# Allegro board PMOD2BNCSIMPLE_v1_06_62mil.brd
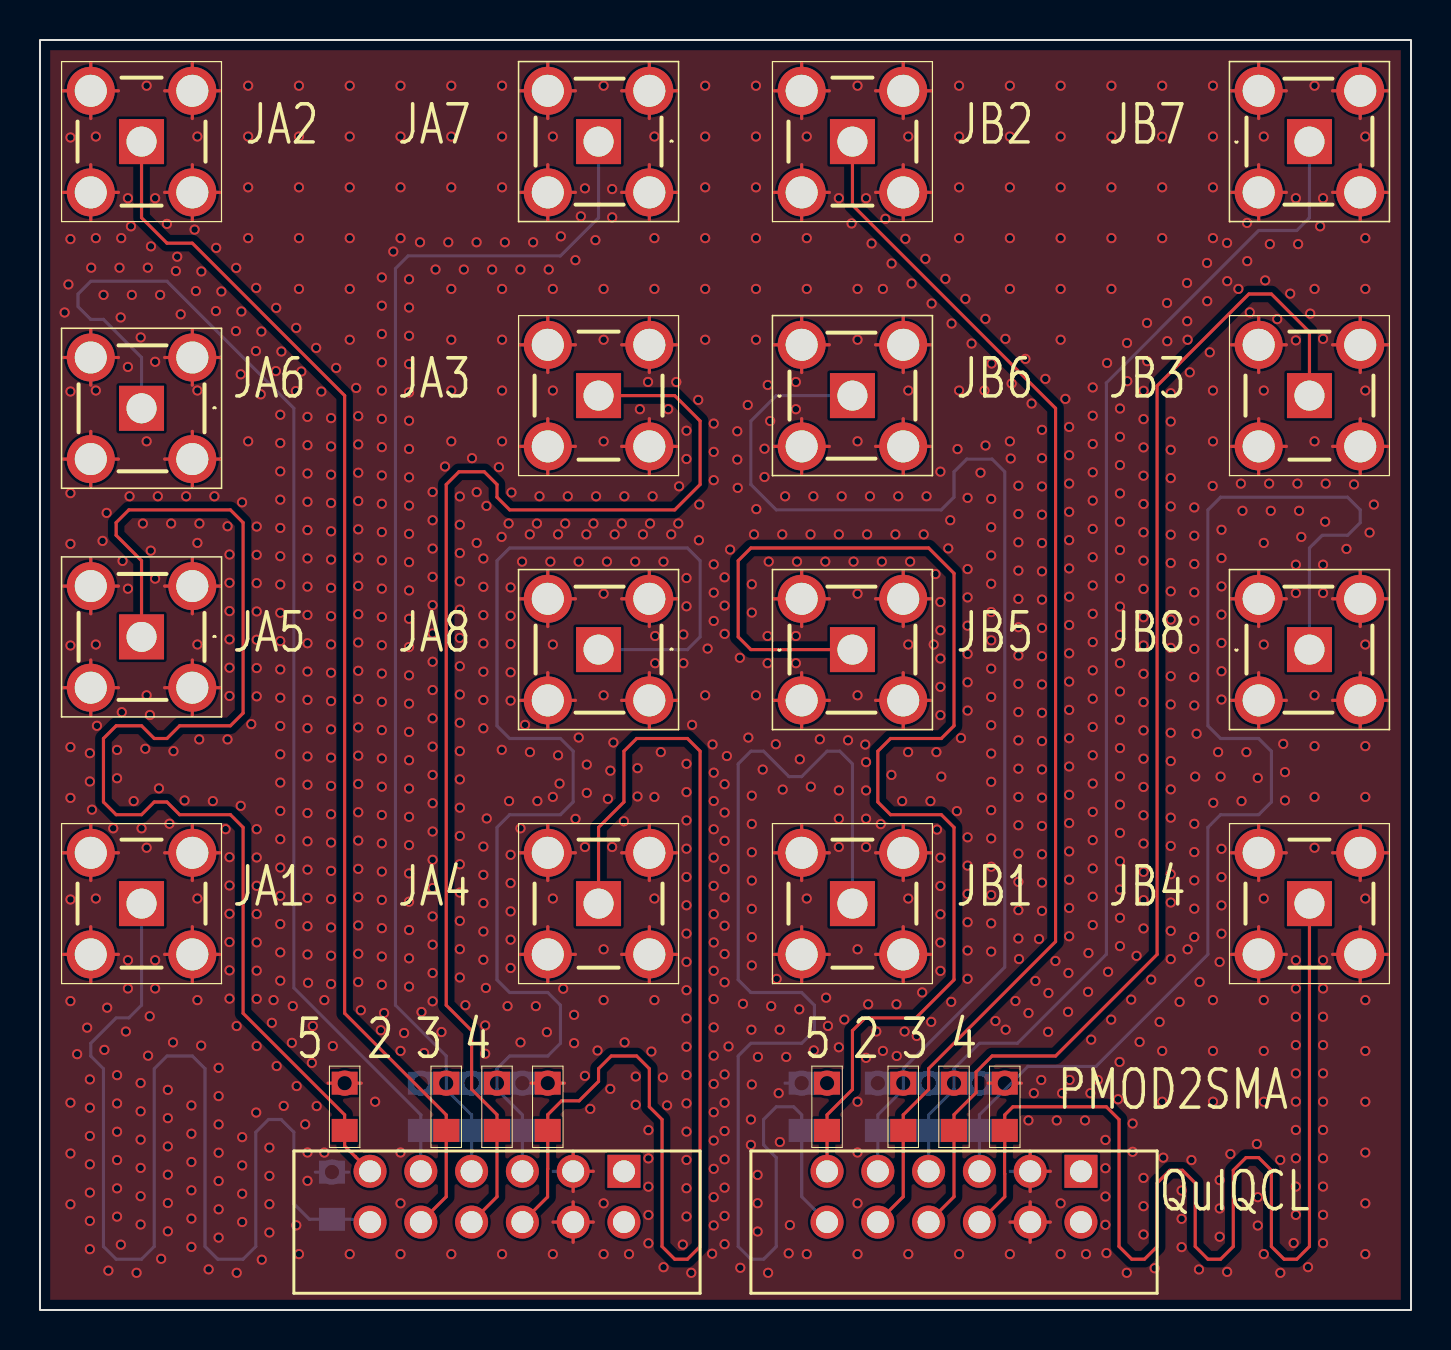
[diagram p0: board, top side]
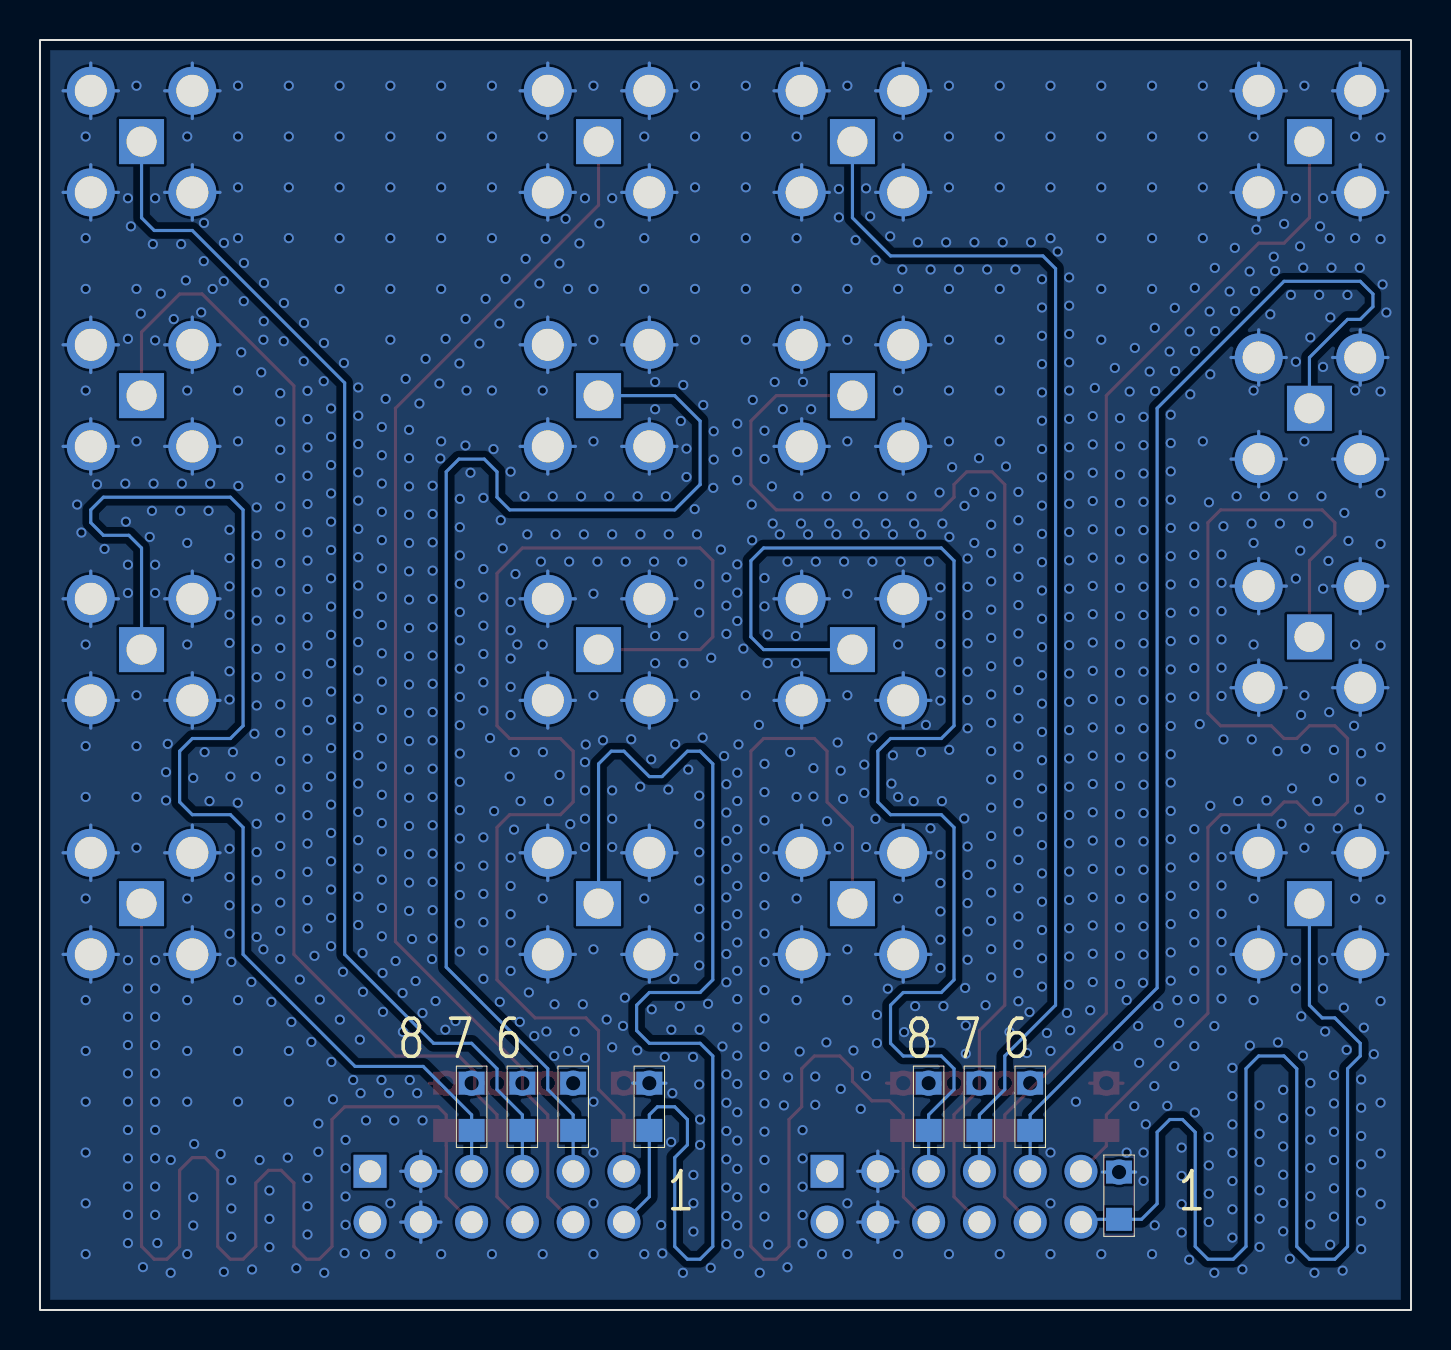
[diagram p1: board, bottom side, seen from below]

Outline 68.58 x 63.5 mm; copper layers: TOP, GND1, GND2, BOTTOM. Coordinates in mm from the lower left corner of the outline.
Outline path: rectangle 0,0 68.58,63.5

## Design rules (mm)
nets with their own width: min track width 0.157; nets GND N17882 N17894 N17906 N17918 N17930 N17948 N17973 N17998 N19655 N19661 N19667 N19673 N19679 N19687 N19697 N19707

## Placement (name value [footprint] x y rotation side)
J1  71764_0114  [717640112]  12.7 0.84 180 top
J2  71764_0114  [717640112]  35.56 0.84 180 top
R1  -  [RES_0805]  24.13 10.16 90 bottom
R2  -  [RES_0805]  21.59 10.16 90 bottom
R3  -  [RES_0805]  19.05 10.16 90 bottom
R4  -  [RES_0805]  15.24 10.16 90 top
R5  -  [RES_0805]  14.61 5.71 90 bottom
R6  -  [RES_0805]  20.32 10.16 90 top
R7  -  [RES_0805]  22.86 10.16 90 top
R8  -  [RES_0805]  25.4 10.16 90 top
R9  -  [RES_0805]  46.99 10.16 90 bottom
R10  -  [RES_0805]  44.45 10.16 90 bottom
R11  -  [RES_0805]  41.91 10.16 90 bottom
R12  -  [RES_0805]  39.37 10.16 90 top
R13  -  [RES_0805]  38.1 10.16 90 bottom
R14  -  [RES_0805]  43.18 10.16 90 top
R15  -  [RES_0805]  45.72 10.16 90 top
R16  -  [RES_0805]  48.26 10.16 90 top
U1  -  [SMA-R-RA]  5.08 33.66 180 top
U2  -  [SMAFST_PCBN]  5.08 20.32 180 top
U3  -  [SMA-R-RA]  5.08 45.09 180 top
U4  -  [SMAFST_PCBN]  5.08 58.42 180 top
U5  -  [SMA-R-RA]  27.94 58.42 180 top
U6  -  [SMAFST_PCBN]  27.94 45.72 180 top
U7  -  [SMA-R-RA]  27.94 33.02 180 top
U8  -  [SMAFST_PCBN]  27.94 20.32 180 top
U9  -  [SMA-R-RA]  40.64 33.02 0 top
U10  -  [SMAFST_PCBN]  40.64 20.32 180 top
U11  -  [SMA-R-RA]  40.64 45.72 0 top
U12  -  [SMAFST_PCBN]  40.64 58.42 180 top
U13  -  [SMA-R-RA]  63.5 58.42 0 top
U14  -  [SMAFST_PCBN]  63.5 45.72 180 top
U15  -  [SMA-R-RA]  63.5 33.02 0 top
U16  -  [SMAFST_PCBN]  63.5 20.32 180 top

## Library data of the parts
J1 J2 = 71764_0114
R1-R3 R5-R16 = RES_0805
R4 = RES_0805: signal model: resistorPack_850
U1 U3 U5 U7 U9 U11 U13 U15 = SMA-R-RA
U2 U4 U6 U8 U10 U12 U14 U16 = SMAFST_PCBN

## Footprints (pads in the part's own frame, mm; a bottom-side part is the same pattern mirrored in y, then rotated)
717640112
  rect 1.651x1.651 hole 1.1: 1(-16.51,-6.096)
  round 1.651 hole 1.1: 2(-16.51,-3.556) 3(-13.97,-6.096) 4(-13.97,-3.556) 5(-11.43,-6.096) 6(-11.43,-3.556) 7(-8.89,-6.096) 8(-8.89,-3.556) 9(-6.35,-6.096) 10(-6.35,-3.556) 11(-3.81,-6.096) 12(-3.81,-3.556)
RES_0805
  rect 1.151x1.3 smd: 1(1.181,0) 2(-1.181,0)
SMA-R-RA
  rect 2.25x2.25 hole 1.501: 1(0,0)
  round 2.4 hole 1.6: 2(-2.54,2.54) 3(-2.54,-2.54) 4(2.54,-2.54) 5(2.54,2.54)
SMAFST_PCBN
  rect 2.25x2.25 hole 1.501: 1(0,0)
  round 2.4 hole 1.6: 2(-2.54,-2.54) 3(2.54,-2.54) 4(2.54,2.54) 5(-2.54,2.54)

## Nets
GND: J1.3 J1.4 J2.3 J2.4 R1.1 R2.1 R3.1 R4.1 R5.1 R6.1 R7.1 R8.1 R9.1 R10.1 R11.1 R12.1 R13.1 R14.1 R15.1 R16.1 U1.2 U1.3 U1.4 U1.5 U2.2 U2.3 U2.4 U2.5 U3.2 U3.3 U3.4 U3.5 U4.2 U4.3 U4.4 U4.5 U5.2 U5.3 U5.4 U5.5 U6.2 U6.3 U6.4 U6.5 U7.2 U7.3 U7.4 U7.5 U8.2 U8.3 U8.4 U8.5 U9.2 U9.3 U9.4 U9.5 U10.2 U10.3 U10.4 U10.5 U11.2 U11.3 U11.4 U11.5 U12.2 U12.3 U12.4 U12.5 U13.2 U13.3 U13.4 U13.5 U14.2 U14.3 U14.4 U14.5 U15.2 U15.3 U15.4 U15.5 U16.2 U16.3 U16.4 U16.5
N17882: J1.11 R4.2 U1.1
N17894: J1.9 R3.2 U3.1
N17906: J1.7 R2.2 U5.1
N17918: J1.5 R1.2 U7.1
N17930: J1.12 R5.2 U2.1
N17948: J1.10 R6.2 U4.1
N17973: J1.8 R7.2 U6.1
N17998: J1.6 R8.2 U8.1
N19655: J2.11 R12.2 U9.1
N19661: J2.9 R11.2 U11.1
N19667: J2.7 R10.2 U13.1
N19673: J2.5 R9.2 U15.1
N19679: J2.12 R13.2 U10.1
N19687: J2.10 R14.2 U12.1
N19697: J2.8 R15.2 U14.1
N19707: J2.6 R16.2 U16.1

Pads without a net: J1 1 2; J2 1 2

## Via types
v1: diameter 0.508, hole 0.33, TOP to BOTTOM, 1266 vias
v2: diameter 1.27, hole 0.711, TOP to GND1, 8 vias
v3: diameter 1.27, hole 0.711, GND2 to BOTTOM, 8 vias

## Routing (per net, layer and track width the routed paths; a pad name or vN(x,y) marks a point on that pad's centre or on a via; arc(x,y) is an arc through that point)
GND: length 1488.4
  TOP w0.157: U12.3 38.1,62.34 ; U12.3 38.1,59.58 ; U12.3 39.48,60.96 ; U12.3 36.72,60.96 ; U8.5 31.86,17.78 ; U8.5 30.48,19.16 ; U8.5 30.48,16.4 ; U8.5 29.1,17.78 ; U2.5 9,17.78 ; U2.5 6.24,17.78 ; U2.5 7.62,16.4 ; U2.5 7.62,19.16 ; U15.3 60.96,31.86 ; U15.3 60.96,29.1 ; U15.3 59.58,30.48 ; U15.3 62.34,30.48 ; 30.48,46.88 U6.2 ; U6.2 30.48,49.64 ; U6.2 29.1,48.26 ; U6.2 31.86,48.26 ; 36.72,55.88 U12.4 ; U12.4 39.48,55.88 ; U12.4 38.1,57.26 ; U12.4 38.1,54.5 ; U16.5 66.04,19.16 ; U16.5 67.42,17.78 ; U16.5 64.66,17.78 ; U16.5 66.04,16.4 ; 25.4,16.4 U8.4 ; U8.4 26.78,17.78 ; U8.4 24.02,17.78 ; U8.4 25.4,19.16 ; U5.2 30.48,57.26 ; U5.2 31.86,55.88 ; U5.2 30.48,54.5 ; U5.2 29.1,55.88 ; U4.2 9,60.96 ; U4.2 7.62,62.34 ; U4.2 7.62,59.58 ; U4.2 6.24,60.96 ; 29.1,60.96 U5.3 ; U5.3 30.48,62.34 ; U5.3 31.86,60.96 ; U5.3 30.48,59.58 ; U9.4 44.56,30.48 ; U9.4 43.18,31.86 ; U9.4 43.18,29.1 ; U9.4 41.8,30.48 ; U14.4 62.34,43.18 ; U14.4 59.58,43.18 ; U14.4 60.96,41.8 ; U14.4 60.96,44.56 ; U14.5 66.04,44.56 ; U14.5 66.04,41.8 ; U14.5 64.66,43.18 ; U14.5 67.42,43.18 ; U13.3 62.34,55.88 ; U13.3 60.96,54.5 ; U13.3 60.96,57.26 ; U13.3 59.58,55.88 ; U7.3 31.86,35.56 ; U7.3 30.48,34.18 ; U7.3 30.48,36.94 ; U7.3 29.1,35.56 ; U12.5 43.18,57.26 ; U12.5 44.56,55.88 ; U12.5 43.18,54.5 ; U12.5 41.8,55.88 ; U4.4 2.54,57.26 ; U4.4 2.54,54.5 ; U4.4 3.92,55.88 ; U4.4 1.16,55.88 ; 1.16,60.96 U4.3 ; U4.3 2.54,62.34 ; U4.3 3.92,60.96 ; U4.3 2.54,59.58 ; U14.2 66.04,49.64 ; U14.2 64.66,48.26 ; U14.2 66.04,46.88 ; U14.2 67.42,48.26 ; U1.3 9,36.2 ; U1.3 7.62,34.81 ; U1.3 7.62,37.58 ; U1.3 6.24,36.2 ; 59.58,17.78 U16.4 ; U16.4 60.96,16.4 ; U16.4 60.96,19.16 ; U16.4 62.34,17.78 ; U15.5 67.42,35.56 ; U15.5 66.04,36.94 ; U15.5 66.04,34.18 ; U15.5 64.66,35.56 ; 30.48,21.48 U8.2 ; U8.2 31.86,22.86 ; U8.2 30.48,24.24 ; U8.2 29.1,22.86 ; 60.96,59.58 U13.2 ; U13.2 59.58,60.96 ; U13.2 60.96,62.34 ; U13.2 62.34,60.96 ; 24.02,60.96 U5.4 ; U5.4 26.78,60.96 ; U5.4 25.4,59.58 ; U5.4 25.4,62.34 ; 6.24,55.88 U4.5 ; U4.5 7.62,57.26 ; U4.5 9,55.88 ; U4.5 7.62,54.5 ; 2.54,34.81 U1.4 ; U1.4 2.54,37.58 ; U1.4 3.92,36.2 ; U1.4 1.16,36.2 ; U3.5 3.92,42.55 ; U3.5 1.16,42.55 ; U3.5 2.54,41.16 ; U3.5 2.54,43.93 ; 41.8,48.26 U11.5 ; U11.5 43.18,49.64 ; U11.5 43.18,46.88 ; U11.5 44.56,48.26 ; U11.3 39.48,43.18 ; U11.3 36.72,43.18 ; U11.3 38.1,41.8 ; U11.3 38.1,44.56 ; U15.2 62.34,35.56 ; U15.2 60.96,34.18 ; U15.2 59.58,35.56 ; U15.2 60.96,36.94 ; U5.5 25.4,57.26 ; U5.5 26.78,55.88 ; U5.5 25.4,54.5 ; U5.5 24.02,55.88 ; 43.18,41.8 U11.4 ; U11.4 44.56,43.18 ; U11.4 43.18,44.56 ; U11.4 41.8,43.18 ; 24.57,11.34 v2(25.4,11.34) 26.23,11.34 ; U1.5 3.92,31.11 ; U1.5 1.16,31.11 ; U1.5 2.54,32.5 ; U1.5 2.54,29.73 ; U9.3 39.48,30.48 ; U9.3 38.1,31.86 ; U9.3 36.72,30.48 ; U9.3 38.1,29.1 ; 25.4,21.48 U8.3 ; U8.3 24.02,22.86 ; U8.3 26.78,22.86 ; U8.3 25.4,24.24 ; 7.62,41.16 U3.2 ; U3.2 6.24,42.55 ; U3.2 7.62,43.93 ; U3.2 9,42.55 ; 38.1,16.4 U10.4 ; U10.4 36.72,17.78 ; U10.4 38.1,19.16 ; U10.4 39.48,17.78 ; U13.5 67.42,60.96 ; U13.5 64.66,60.96 ; U13.5 66.04,62.34 ; U13.5 66.04,59.58 ; 59.58,22.86 U16.3 ; U16.3 62.34,22.86 ; U16.3 60.96,24.24 ; U16.3 60.96,21.48 ; U6.4 26.78,43.18 ; U6.4 25.4,44.56 ; U6.4 25.4,41.8 ; U6.4 24.02,43.18 ; 66.04,21.48 U16.2 ; U16.2 64.66,22.86 ; U16.2 66.04,24.24 ; U16.2 67.42,22.86 ; J2.3 50.54,6.93 ; J2.3 49.53,5.93 ; J2.3 49.53,7.94 ; 49.09,11.34 v2(48.26,11.34) 47.43,11.34 ; 25.66,4.39 J1.4 ; J1.4 26.67,5.4 ; J1.4 26.67,3.39 ; J1.4 27.68,4.39 ; 29.1,43.18 U6.5 ; U6.5 30.48,41.8 ; U6.5 31.86,43.18 ; U6.5 30.48,44.56 ; U13.4 66.04,57.26 ; U13.4 64.66,55.88 ; U13.4 66.04,54.5 ; U13.4 67.42,55.88 ; 43.18,21.48 U10.2 ; U10.2 41.8,22.86 ; U10.2 43.18,24.24 ; U10.2 44.56,22.86 ; U7.5 26.78,30.48 ; U7.5 24.02,30.48 ; U7.5 25.4,29.1 ; U7.5 25.4,31.86 ; 16.07,11.34 v2(15.24,11.34) 14.41,11.34 ; 2.54,16.4 U2.4 ; U2.4 2.54,19.16 ; U2.4 3.92,17.78 ; U2.4 1.16,17.78 ; U7.4 26.78,35.56 ; U7.4 25.4,34.18 ; U7.4 24.02,35.56 ; U7.4 25.4,36.94 ; 49.53,3.39 J2.4 ; J2.4 48.52,4.39 ; J2.4 49.53,5.4 ; J2.4 50.54,4.39 ; 36.72,35.56 U9.2 ; U9.2 39.48,35.56 ; U9.2 38.1,34.18 ; U9.2 38.1,36.94 ; 2.54,46.24 U3.4 ; U3.4 1.16,47.62 ; U3.4 3.92,47.62 ; U3.4 2.54,49.01 ; 6.24,22.86 U2.2 ; U2.2 7.62,21.48 ; U2.2 9,22.86 ; U2.2 7.62,24.24 ; U6.3 25.4,49.64 ; U6.3 26.78,48.26 ; U6.3 25.4,46.88 ; U6.3 24.02,48.26 ; U3.3 9,47.62 ; U3.3 7.62,46.24 ; U3.3 7.62,49.01 ; U3.3 6.24,47.62 ; U10.3 39.48,22.86 ; U10.3 38.1,21.48 ; U10.3 38.1,24.24 ; U10.3 36.72,22.86 ; U14.3 60.96,49.64 ; U14.3 62.34,48.26 ; U14.3 60.96,46.88 ; U14.3 59.58,48.26 ; 41.8,35.56 U9.5 ; U9.5 44.56,35.56 ; U9.5 43.18,36.94 ; U9.5 43.18,34.18 ; 26.67,5.93 J1.3 ; J1.3 27.68,6.93 ; J1.3 26.67,7.94 ; 41.8,60.96 U12.2 ; U12.2 43.18,62.34 ; U12.2 44.56,60.96 ; U12.2 43.18,59.58 ; U11.2 39.48,48.26 ; U11.2 36.72,48.26 ; U11.2 38.1,49.64 ; U11.2 38.1,46.88 ; U15.4 66.04,31.86 ; U15.4 64.66,30.48 ; U15.4 67.42,30.48 ; U15.4 66.04,29.1 ; U7.2 31.86,30.48 ; U7.2 30.48,31.86 ; U7.2 29.1,30.48 ; U7.2 30.48,29.1 ; U2.3 2.54,24.24 ; U2.3 3.92,22.86 ; U2.3 2.54,21.48 ; U2.3 1.16,22.86 ; 41.8,17.78 U10.5 ; U10.5 44.56,17.78 ; U10.5 43.18,19.16 ; U10.5 43.18,16.4 ; 7.62,29.73 U1.2 ; U1.2 9,31.11 ; U1.2 7.62,32.5 ; U1.2 6.24,31.11
  GND1 w0.157: U1.2 7.62,32.5 ; U1.2 9,31.11 ; U1.2 6.24,31.11 ; U1.2 7.62,29.73 ; U11.2 38.1,49.64 ; U11.2 39.48,48.26 ; U11.2 38.1,46.88 ; U11.2 36.72,48.26 ; 7.62,59.58 U4.2 ; U4.2 7.62,62.34 ; U4.2 6.24,60.96 ; U4.2 9,60.96 ; 29.1,43.18 U6.5 ; U6.5 30.48,41.8 ; U6.5 30.48,44.56 ; U6.5 31.86,43.18 ; U5.4 25.4,62.34 ; U5.4 24.02,60.96 ; U5.4 26.78,60.96 ; U5.4 25.4,59.58 ; U10.3 39.48,22.86 ; U10.3 38.1,21.48 ; U10.3 38.1,24.24 ; U10.3 36.72,22.86 ; U8.3 26.78,22.86 ; U8.3 25.4,24.24 ; U8.3 25.4,21.48 ; U8.3 24.02,22.86 ; U4.3 3.92,60.96 ; U4.3 2.54,59.58 ; U4.3 2.54,62.34 ; U4.3 1.16,60.96 ; U13.3 60.96,57.26 ; U13.3 59.58,55.88 ; U13.3 62.34,55.88 ; U13.3 60.96,54.5 ; U1.4 2.54,37.58 ; U1.4 1.16,36.2 ; U1.4 2.54,34.81 ; U1.4 3.92,36.2 ; U6.3 26.78,48.26 ; U6.3 24.02,48.26 ; U6.3 25.4,46.88 ; U6.3 25.4,49.64 ; 1.16,42.55 U3.5 ; U3.5 2.54,43.93 ; U3.5 3.92,42.55 ; U3.5 2.54,41.16 ; U7.5 25.4,31.86 ; U7.5 25.4,29.1 ; U7.5 24.02,30.48 ; U7.5 26.78,30.48 ; 1.16,17.78 U2.4 ; U2.4 3.92,17.78 ; U2.4 2.54,16.4 ; U2.4 2.54,19.16 ; 59.58,22.86 U16.3 ; U16.3 62.34,22.86 ; U16.3 60.96,21.48 ; U16.3 60.96,24.24 ; U12.4 38.1,57.26 ; U12.4 39.48,55.88 ; U12.4 38.1,54.5 ; U12.4 36.72,55.88 ; U6.2 30.48,49.64 ; U6.2 30.48,46.88 ; U6.2 29.1,48.26 ; U6.2 31.86,48.26 ; U9.5 44.56,35.56 ; U9.5 43.18,34.18 ; U9.5 43.18,36.94 ; U9.5 41.8,35.56 ; 26.67,3.39 J1.4 ; J1.4 27.68,4.39 ; J1.4 25.66,4.39 ; J1.4 26.67,5.4 ; 66.04,59.58 U13.5 ; U13.5 66.04,62.34 ; U13.5 67.42,60.96 ; U13.5 64.66,60.96 ; 1.16,55.88 U4.4 ; U4.4 2.54,57.26 ; U4.4 2.54,54.5 ; U4.4 3.92,55.88 ; U15.4 67.42,30.48 ; U15.4 64.66,30.48 ; U15.4 66.04,29.1 ; U15.4 66.04,31.86 ; U12.2 44.56,60.96 ; U12.2 43.18,59.58 ; U12.2 41.8,60.96 ; U12.2 43.18,62.34 ; 64.66,43.18 U14.5 ; U14.5 67.42,43.18 ; U14.5 66.04,41.8 ; U14.5 66.04,44.56 ; U7.2 31.86,30.48 ; U7.2 29.1,30.48 ; U7.2 30.48,29.1 ; U7.2 30.48,31.86 ; 7.62,41.16 U3.2 ; U3.2 9,42.55 ; U3.2 7.62,43.93 ; U3.2 6.24,42.55 ; U11.5 43.18,49.64 ; U11.5 43.18,46.88 ; U11.5 41.8,48.26 ; U11.5 44.56,48.26 ; 64.66,48.26 U14.2 ; U14.2 66.04,46.88 ; U14.2 66.04,49.64 ; U14.2 67.42,48.26 ; 38.1,29.1 U9.3 ; U9.3 38.1,31.86 ; U9.3 36.72,30.48 ; U9.3 39.48,30.48 ; 60.96,59.58 U13.2 ; U13.2 60.96,62.34 ; U13.2 62.34,60.96 ; U13.2 59.58,60.96 ; 59.58,43.18 U14.4 ; U14.4 60.96,44.56 ; U14.4 62.34,43.18 ; U14.4 60.96,41.8 ; U8.5 31.86,17.78 ; U8.5 30.48,19.16 ; U8.5 29.1,17.78 ; U8.5 30.48,16.4 ; 66.04,16.4 U16.5 ; U16.5 66.04,19.16 ; U16.5 67.42,17.78 ; U16.5 64.66,17.78 ; 6.24,55.88 U4.5 ; U4.5 7.62,57.26 ; U4.5 7.62,54.5 ; U4.5 9,55.88 ; U14.3 60.96,49.64 ; U14.3 59.58,48.26 ; U14.3 60.96,46.88 ; U14.3 62.34,48.26 ; U9.2 39.48,35.56 ; U9.2 38.1,36.94 ; U9.2 36.72,35.56 ; U9.2 38.1,34.18 ; U5.5 26.78,55.88 ; U5.5 25.4,54.5 ; U5.5 24.02,55.88 ; U5.5 25.4,57.26 ; 30.48,54.5 U5.2 ; U5.2 31.86,55.88 ; U5.2 30.48,57.26 ; U5.2 29.1,55.88 ; 60.96,16.4 U16.4 ; U16.4 60.96,19.16 ; U16.4 62.34,17.78 ; U16.4 59.58,17.78 ; U11.4 44.56,43.18 ; U11.4 43.18,44.56 ; U11.4 41.8,43.18 ; U11.4 43.18,41.8 ; U10.2 43.18,24.24 ; U10.2 43.18,21.48 ; U10.2 44.56,22.86 ; U10.2 41.8,22.86 ; U10.4 39.48,17.78 ; U10.4 36.72,17.78 ; U10.4 38.1,16.4 ; U10.4 38.1,19.16 ; 24.02,17.78 U8.4 ; U8.4 25.4,19.16 ; U8.4 26.78,17.78 ; U8.4 25.4,16.4 ; 64.66,35.56 U15.5 ; U15.5 66.04,34.18 ; U15.5 66.04,36.94 ; U15.5 67.42,35.56 ; 7.62,16.4 U2.5 ; U2.5 6.24,17.78 ; U2.5 7.62,19.16 ; U2.5 9,17.78 ; U1.5 2.54,32.5 ; U1.5 3.92,31.11 ; U1.5 2.54,29.73 ; U1.5 1.16,31.11 ; 7.62,46.24 U3.3 ; U3.3 9,47.62 ; U3.3 6.24,47.62 ; U3.3 7.62,49.01 ; U15.2 62.34,35.56 ; U15.2 59.58,35.56 ; U15.2 60.96,36.94 ; U15.2 60.96,34.18 ; 2.54,21.48 U2.3 ; U2.3 2.54,24.24 ; U2.3 3.92,22.86 ; U2.3 1.16,22.86 ; U16.2 66.04,24.24 ; U16.2 66.04,21.48 ; U16.2 64.66,22.86 ; U16.2 67.42,22.86 ; U12.5 43.18,57.26 ; U12.5 44.56,55.88 ; U12.5 41.8,55.88 ; U12.5 43.18,54.5 ; U6.4 25.4,44.56 ; U6.4 26.78,43.18 ; U6.4 25.4,41.8 ; U6.4 24.02,43.18 ; U12.3 39.48,60.96 ; U12.3 38.1,59.58 ; U12.3 36.72,60.96 ; U12.3 38.1,62.34 ; 29.1,60.96 U5.3 ; U5.3 30.48,59.58 ; U5.3 30.48,62.34 ; U5.3 31.86,60.96 ; U9.4 44.56,30.48 ; U9.4 43.18,31.86 ; U9.4 43.18,29.1 ; U9.4 41.8,30.48 ; 24.02,35.56 U7.4 ; U7.4 25.4,36.94 ; U7.4 25.4,34.18 ; U7.4 26.78,35.56 ; 48.52,6.93 J2.3 ; J2.3 50.54,6.93 ; J2.3 49.53,5.93 ; J2.3 49.53,7.94 ; 7.62,21.48 U2.2 ; U2.2 9,22.86 ; U2.2 6.24,22.86 ; U2.2 7.62,24.24 ; U7.3 30.48,36.94 ; U7.3 29.1,35.56 ; U7.3 31.86,35.56 ; U7.3 30.48,34.18 ; U10.5 43.18,19.16 ; U10.5 44.56,17.78 ; U10.5 41.8,17.78 ; U10.5 43.18,16.4 ; U11.3 38.1,44.56 ; U11.3 39.48,43.18 ; U11.3 38.1,41.8 ; U11.3 36.72,43.18 ; 25.66,6.93 J1.3 ; J1.3 26.67,7.94 ; J1.3 26.67,5.93 ; J1.3 27.68,6.93 ; 1.16,47.62 U3.4 ; U3.4 2.54,46.24 ; U3.4 2.54,49.01 ; U3.4 3.92,47.62 ; U8.2 30.48,24.24 ; U8.2 29.1,22.86 ; U8.2 30.48,21.48 ; U8.2 31.86,22.86 ; 66.04,54.5 U13.4 ; U13.4 67.42,55.88 ; U13.4 64.66,55.88 ; U13.4 66.04,57.26 ; 59.58,30.48 U15.3 ; U15.3 60.96,29.1 ; U15.3 62.34,30.48 ; U15.3 60.96,31.86 ; 7.62,34.81 U1.3 ; U1.3 6.24,36.2 ; U1.3 9,36.2 ; U1.3 7.62,37.58 ; J2.4 49.53,5.4 ; J2.4 50.54,4.39 ; J2.4 48.52,4.39 ; J2.4 49.53,3.39
  GND2 w0.157: U9.5 44.56,35.56 ; U9.5 41.8,35.56 ; U9.5 43.18,34.18 ; U9.5 43.18,36.94 ; 66.04,59.58 U13.5 ; U13.5 67.42,60.96 ; U13.5 64.66,60.96 ; U13.5 66.04,62.34 ; U5.4 25.4,62.34 ; U5.4 25.4,59.58 ; U5.4 26.78,60.96 ; U5.4 24.02,60.96 ; 66.04,16.4 U16.5 ; U16.5 66.04,19.16 ; U16.5 64.66,17.78 ; U16.5 67.42,17.78 ; 6.24,55.88 U4.5 ; U4.5 7.62,54.5 ; U4.5 9,55.88 ; U4.5 7.62,57.26 ; 6.24,47.62 U3.3 ; U3.3 9,47.62 ; U3.3 7.62,46.24 ; U3.3 7.62,49.01 ; 41.8,22.86 U10.2 ; U10.2 43.18,21.48 ; U10.2 43.18,24.24 ; U10.2 44.56,22.86 ; J2.3 50.54,6.93 ; J2.3 49.53,5.93 ; J2.3 49.53,7.94 ; J2.3 48.52,6.93 ; U16.4 62.34,17.78 ; U16.4 60.96,19.16 ; U16.4 60.96,16.4 ; U16.4 59.58,17.78 ; U11.3 39.48,43.18 ; U11.3 38.1,41.8 ; U11.3 36.72,43.18 ; U11.3 38.1,44.56 ; U1.4 2.54,37.58 ; U1.4 3.92,36.2 ; U1.4 2.54,34.81 ; U1.4 1.16,36.2 ; U10.4 38.1,19.16 ; U10.4 36.72,17.78 ; U10.4 39.48,17.78 ; U10.4 38.1,16.4 ; 29.1,48.26 U6.2 ; U6.2 31.86,48.26 ; U6.2 30.48,46.88 ; U6.2 30.48,49.64 ; 25.4,29.1 U7.5 ; U7.5 24.02,30.48 ; U7.5 25.4,31.86 ; U7.5 26.78,30.48 ; 66.04,46.88 U14.2 ; U14.2 66.04,49.64 ; U14.2 67.42,48.26 ; U14.2 64.66,48.26 ; U16.3 62.34,22.86 ; U16.3 60.96,24.24 ; U16.3 60.96,21.48 ; U16.3 59.58,22.86 ; 38.1,46.88 U11.2 ; U11.2 36.72,48.26 ; U11.2 38.1,49.64 ; U11.2 39.48,48.26 ; U15.5 67.42,35.56 ; U15.5 64.66,35.56 ; U15.5 66.04,36.94 ; U15.5 66.04,34.18 ; 36.72,22.86 U10.3 ; U10.3 39.48,22.86 ; U10.3 38.1,21.48 ; U10.3 38.1,24.24 ; U6.4 25.4,44.56 ; U6.4 25.4,41.8 ; U6.4 26.78,43.18 ; U6.4 24.02,43.18 ; U2.4 3.92,17.78 ; U2.4 2.54,16.4 ; U2.4 2.54,19.16 ; U2.4 1.16,17.78 ; 7.62,21.48 U2.2 ; U2.2 7.62,24.24 ; U2.2 9,22.86 ; U2.2 6.24,22.86 ; U3.5 2.54,43.93 ; U3.5 1.16,42.55 ; U3.5 2.54,41.16 ; U3.5 3.92,42.55 ; 6.24,60.96 U4.2 ; U4.2 9,60.96 ; U4.2 7.62,62.34 ; U4.2 7.62,59.58 ; 59.58,60.96 U13.2 ; U13.2 60.96,59.58 ; U13.2 60.96,62.34 ; U13.2 62.34,60.96 ; 25.4,34.18 U7.4 ; U7.4 25.4,36.94 ; U7.4 26.78,35.56 ; U7.4 24.02,35.56 ; U8.4 26.78,17.78 ; U8.4 25.4,16.4 ; U8.4 25.4,19.16 ; U8.4 24.02,17.78 ; 25.4,21.48 U8.3 ; U8.3 25.4,24.24 ; U8.3 26.78,22.86 ; U8.3 24.02,22.86 ; U12.5 43.18,57.26 ; U12.5 41.8,55.88 ; U12.5 44.56,55.88 ; U12.5 43.18,54.5 ; U13.3 60.96,57.26 ; U13.3 60.96,54.5 ; U13.3 59.58,55.88 ; U13.3 62.34,55.88 ; 29.1,55.88 U5.2 ; U5.2 31.86,55.88 ; U5.2 30.48,57.26 ; U5.2 30.48,54.5 ; U1.2 7.62,32.5 ; U1.2 7.62,29.73 ; U1.2 9,31.11 ; U1.2 6.24,31.11 ; 24.02,55.88 U5.5 ; U5.5 26.78,55.88 ; U5.5 25.4,57.26 ; U5.5 25.4,54.5 ; U4.3 2.54,62.34 ; U4.3 1.16,60.96 ; U4.3 3.92,60.96 ; U4.3 2.54,59.58 ; 64.66,30.48 U15.4 ; U15.4 67.42,30.48 ; U15.4 66.04,29.1 ; U15.4 66.04,31.86 ; U9.2 39.48,35.56 ; U9.2 36.72,35.56 ; U9.2 38.1,36.94 ; U9.2 38.1,34.18 ; U5.3 31.86,60.96 ; U5.3 30.48,59.58 ; U5.3 29.1,60.96 ; U5.3 30.48,62.34 ; 29.1,30.48 U7.2 ; U7.2 31.86,30.48 ; U7.2 30.48,29.1 ; U7.2 30.48,31.86 ; 1.16,22.86 U2.3 ; U2.3 2.54,21.48 ; U2.3 3.92,22.86 ; U2.3 2.54,24.24 ; U1.3 9,36.2 ; U1.3 7.62,37.58 ; U1.3 6.24,36.2 ; U1.3 7.62,34.81 ; U9.4 43.18,31.86 ; U9.4 43.18,29.1 ; U9.4 44.56,30.48 ; U9.4 41.8,30.48 ; 25.66,6.93 J1.3 ; J1.3 27.68,6.93 ; J1.3 26.67,5.93 ; J1.3 26.67,7.94 ; U12.3 38.1,62.34 ; U12.3 38.1,59.58 ; U12.3 36.72,60.96 ; U12.3 39.48,60.96 ; U14.4 60.96,44.56 ; U14.4 59.58,43.18 ; U14.4 60.96,41.8 ; U14.4 62.34,43.18 ; U3.4 3.92,47.62 ; U3.4 2.54,49.01 ; U3.4 2.54,46.24 ; U3.4 1.16,47.62 ; U6.5 31.86,43.18 ; U6.5 30.48,41.8 ; U6.5 30.48,44.56 ; U6.5 29.1,43.18 ; 41.8,17.78 U10.5 ; U10.5 43.18,16.4 ; U10.5 44.56,17.78 ; U10.5 43.18,19.16 ; 6.24,42.55 U3.2 ; U3.2 7.62,43.93 ; U3.2 7.62,41.16 ; U3.2 9,42.55 ; 25.4,46.88 U6.3 ; U6.3 26.78,48.26 ; U6.3 25.4,49.64 ; U6.3 24.02,48.26 ; U12.2 44.56,60.96 ; U12.2 41.8,60.96 ; U12.2 43.18,59.58 ; U12.2 43.18,62.34 ; U7.3 30.48,36.94 ; U7.3 31.86,35.56 ; U7.3 29.1,35.56 ; U7.3 30.48,34.18 ; 43.18,46.88 U11.5 ; U11.5 41.8,48.26 ; U11.5 43.18,49.64 ; U11.5 44.56,48.26 ; U15.3 62.34,30.48 ; U15.3 60.96,31.86 ; U15.3 59.58,30.48 ; U15.3 60.96,29.1 ; U8.5 30.48,19.16 ; U8.5 29.1,17.78 ; U8.5 30.48,16.4 ; U8.5 31.86,17.78 ; 26.67,3.39 J1.4 ; J1.4 26.67,5.4 ; J1.4 27.68,4.39 ; J1.4 25.66,4.39 ; 64.66,22.86 U16.2 ; U16.2 67.42,22.86 ; U16.2 66.04,24.24 ; U16.2 66.04,21.48 ; U12.4 39.48,55.88 ; U12.4 38.1,54.5 ; U12.4 36.72,55.88 ; U12.4 38.1,57.26 ; U14.5 66.04,44.56 ; U14.5 64.66,43.18 ; U14.5 67.42,43.18 ; U14.5 66.04,41.8 ; U15.2 62.34,35.56 ; U15.2 60.96,36.94 ; U15.2 60.96,34.18 ; U15.2 59.58,35.56 ; U9.3 38.1,31.86 ; U9.3 39.48,30.48 ; U9.3 36.72,30.48 ; U9.3 38.1,29.1 ; 29.1,22.86 U8.2 ; U8.2 31.86,22.86 ; U8.2 30.48,21.48 ; U8.2 30.48,24.24 ; U1.5 2.54,32.5 ; U1.5 1.16,31.11 ; U1.5 2.54,29.73 ; U1.5 3.92,31.11 ; U11.4 44.56,43.18 ; U11.4 43.18,44.56 ; U11.4 41.8,43.18 ; U11.4 43.18,41.8 ; 64.66,55.88 U13.4 ; U13.4 66.04,54.5 ; U13.4 67.42,55.88 ; U13.4 66.04,57.26 ; U4.4 2.54,57.26 ; U4.4 3.92,55.88 ; U4.4 2.54,54.5 ; U4.4 1.16,55.88 ; 6.24,17.78 U2.5 ; U2.5 9,17.78 ; U2.5 7.62,16.4 ; U2.5 7.62,19.16 ; 49.53,3.39 J2.4 ; J2.4 48.52,4.39 ; J2.4 50.54,4.39 ; J2.4 49.53,5.4 ; U14.3 60.96,49.64 ; U14.3 62.34,48.26 ; U14.3 59.58,48.26 ; U14.3 60.96,46.88
  BOTTOM w0.157: U11.4 43.18,44.56 ; U11.4 43.18,41.8 ; U11.4 41.8,43.18 ; U11.4 44.56,43.18 ; U2.2 7.62,24.24 ; U2.2 7.62,21.48 ; U2.2 6.24,22.86 ; U2.2 9,22.86 ; 60.96,16.4 U16.4 ; U16.4 60.96,19.16 ; U16.4 62.34,17.78 ; U16.4 59.58,17.78 ; U12.5 43.18,57.26 ; U12.5 44.56,55.88 ; U12.5 41.8,55.88 ; U12.5 43.18,54.5 ; J1.3 27.68,6.93 ; J1.3 26.67,7.94 ; J1.3 25.66,6.93 ; J1.3 26.67,5.93 ; U14.4 60.96,44.56 ; U14.4 62.34,43.18 ; U14.4 59.58,43.18 ; U14.4 60.96,41.8 ; U2.4 2.54,19.16 ; U2.4 3.92,17.78 ; U2.4 2.54,16.4 ; U2.4 1.16,17.78 ; U5.3 30.48,62.34 ; U5.3 29.1,60.96 ; U5.3 31.86,60.96 ; U5.3 30.48,59.58 ; 25.4,34.18 U7.4 ; U7.4 25.4,36.94 ; U7.4 26.78,35.56 ; U7.4 24.02,35.56 ; U6.2 31.86,48.26 ; U6.2 29.1,48.26 ; U6.2 30.48,49.64 ; U6.2 30.48,46.88 ; 38.1,46.88 U11.2 ; U11.2 36.72,48.26 ; U11.2 39.48,48.26 ; U11.2 38.1,49.64 ; 64.66,55.88 U13.4 ; U13.4 66.04,57.26 ; U13.4 67.42,55.88 ; U13.4 66.04,54.5 ; U9.4 44.56,30.48 ; U9.4 41.8,30.48 ; U9.4 43.18,29.1 ; U9.4 43.18,31.86 ; U10.2 43.18,24.24 ; U10.2 43.18,21.48 ; U10.2 44.56,22.86 ; U10.2 41.8,22.86 ; 36.72,30.48 U9.3 ; U9.3 39.48,30.48 ; U9.3 38.1,31.86 ; U9.3 38.1,29.1 ; U11.3 39.48,43.18 ; U11.3 36.72,43.18 ; U11.3 38.1,44.56 ; U11.3 38.1,41.8 ; 25.4,41.8 U6.4 ; U6.4 24.02,43.18 ; U6.4 26.78,43.18 ; U6.4 25.4,44.56 ; U10.4 39.48,17.78 ; U10.4 38.1,16.4 ; U10.4 38.1,19.16 ; U10.4 36.72,17.78 ; 64.66,30.48 U15.4 ; U15.4 66.04,29.1 ; U15.4 66.04,31.86 ; U15.4 67.42,30.48 ; U14.3 60.96,49.64 ; U14.3 60.96,46.88 ; U14.3 62.34,48.26 ; U14.3 59.58,48.26 ; U12.3 38.1,62.34 ; U12.3 39.48,60.96 ; U12.3 38.1,59.58 ; U12.3 36.72,60.96 ; 66.04,41.8 U14.5 ; U14.5 66.04,44.56 ; U14.5 67.42,43.18 ; U14.5 64.66,43.18 ; 7.62,59.58 U4.2 ; U4.2 9,60.96 ; U4.2 6.24,60.96 ; U4.2 7.62,62.34 ; U5.2 30.48,57.26 ; U5.2 30.48,54.5 ; U5.2 29.1,55.88 ; U5.2 31.86,55.88 ; 2.54,46.24 U3.4 ; U3.4 1.16,47.62 ; U3.4 3.92,47.62 ; U3.4 2.54,49.01 ; 25.4,46.88 U6.3 ; U6.3 24.02,48.26 ; U6.3 25.4,49.64 ; U6.3 26.78,48.26 ; U14.2 67.42,48.26 ; U14.2 64.66,48.26 ; U14.2 66.04,49.64 ; U14.2 66.04,46.88 ; U8.4 25.4,19.16 ; U8.4 24.02,17.78 ; U8.4 26.78,17.78 ; U8.4 25.4,16.4 ; U5.5 26.78,55.88 ; U5.5 24.02,55.88 ; U5.5 25.4,54.5 ; U5.5 25.4,57.26 ; 25.66,4.39 J1.4 ; J1.4 26.67,3.39 ; J1.4 27.68,4.39 ; J1.4 26.67,5.4 ; 30.48,41.8 U6.5 ; U6.5 31.86,43.18 ; U6.5 29.1,43.18 ; U6.5 30.48,44.56 ; U16.2 67.42,22.86 ; U16.2 64.66,22.86 ; U16.2 66.04,24.24 ; U16.2 66.04,21.48 ; U4.5 7.62,57.26 ; U4.5 9,55.88 ; U4.5 7.62,54.5 ; U4.5 6.24,55.88 ; 1.16,55.88 U4.4 ; U4.4 2.54,57.26 ; U4.4 2.54,54.5 ; U4.4 3.92,55.88 ; U16.3 62.34,22.86 ; U16.3 59.58,22.86 ; U16.3 60.96,24.24 ; U16.3 60.96,21.48 ; 25.4,59.58 U5.4 ; U5.4 24.02,60.96 ; U5.4 26.78,60.96 ; U5.4 25.4,62.34 ; 59.58,60.96 U13.2 ; U13.2 60.96,59.58 ; U13.2 62.34,60.96 ; U13.2 60.96,62.34 ; 1.16,22.86 U2.3 ; U2.3 2.54,21.48 ; U2.3 3.92,22.86 ; U2.3 2.54,24.24 ; 7.62,34.81 U1.3 ; U1.3 6.24,36.2 ; U1.3 7.62,37.58 ; U1.3 9,36.2 ; U8.3 25.4,24.24 ; U8.3 25.4,21.48 ; U8.3 24.02,22.86 ; U8.3 26.78,22.86 ; U15.2 60.96,36.94 ; U15.2 62.34,35.56 ; U15.2 60.96,34.18 ; U15.2 59.58,35.56 ; 7.62,46.24 U3.3 ; U3.3 9,47.62 ; U3.3 6.24,47.62 ; U3.3 7.62,49.01 ; U12.2 43.18,62.34 ; U12.2 41.8,60.96 ; U12.2 43.18,59.58 ; U12.2 44.56,60.96 ; U7.5 26.78,30.48 ; U7.5 25.4,29.1 ; U7.5 24.02,30.48 ; U7.5 25.4,31.86 ; 48.52,6.93 J2.3 ; J2.3 49.53,7.94 ; J2.3 50.54,6.93 ; J2.3 49.53,5.93 ; 30.48,34.18 U7.3 ; U7.3 31.86,35.56 ; U7.3 29.1,35.56 ; U7.3 30.48,36.94 ; U7.2 30.48,31.86 ; U7.2 29.1,30.48 ; U7.2 31.86,30.48 ; U7.2 30.48,29.1 ; 2.54,34.81 U1.4 ; U1.4 3.92,36.2 ; U1.4 2.54,37.58 ; U1.4 1.16,36.2 ; 36.72,35.56 U9.2 ; U9.2 38.1,34.18 ; U9.2 38.1,36.94 ; U9.2 39.48,35.56 ; 1.16,31.11 U1.5 ; U1.5 3.92,31.11 ; U1.5 2.54,29.73 ; U1.5 2.54,32.5 ; U2.5 7.62,19.16 ; U2.5 9,17.78 ; U2.5 7.62,16.4 ; U2.5 6.24,17.78 ; 64.66,17.78 U16.5 ; U16.5 66.04,19.16 ; U16.5 66.04,16.4 ; U16.5 67.42,17.78 ; 64.66,35.56 U15.5 ; U15.5 66.04,36.94 ; U15.5 67.42,35.56 ; U15.5 66.04,34.18 ; 1.16,60.96 U4.3 ; U4.3 3.92,60.96 ; U4.3 2.54,62.34 ; U4.3 2.54,59.58 ; 6.24,42.55 U3.2 ; U3.2 9,42.55 ; U3.2 7.62,41.16 ; U3.2 7.62,43.93 ; U10.3 39.48,22.86 ; U10.3 36.72,22.86 ; U10.3 38.1,24.24 ; U10.3 38.1,21.48 ; 48.52,4.39 J2.4 ; J2.4 50.54,4.39 ; J2.4 49.53,5.4 ; J2.4 49.53,3.39 ; U3.5 2.54,43.93 ; U3.5 1.16,42.55 ; U3.5 2.54,41.16 ; U3.5 3.92,42.55 ; 30.48,16.4 U8.5 ; U8.5 31.86,17.78 ; U8.5 30.48,19.16 ; U8.5 29.1,17.78 ; U10.5 43.18,19.16 ; U10.5 43.18,16.4 ; U10.5 41.8,17.78 ; U10.5 44.56,17.78 ; 29.1,22.86 U8.2 ; U8.2 30.48,21.48 ; U8.2 30.48,24.24 ; U8.2 31.86,22.86 ; U13.5 67.42,60.96 ; U13.5 66.04,62.34 ; U13.5 66.04,59.58 ; U13.5 64.66,60.96 ; U1.2 9,31.11 ; U1.2 7.62,32.5 ; U1.2 7.62,29.73 ; U1.2 6.24,31.11 ; 37.27,11.34 v3(38.1,11.34) 38.93,11.34 ; U9.5 43.18,36.94 ; U9.5 44.56,35.56 ; U9.5 43.18,34.18 ; U9.5 41.8,35.56 ; 60.96,29.1 U15.3 ; U15.3 59.58,30.48 ; U15.3 60.96,31.86 ; U15.3 62.34,30.48 ; U12.4 38.1,57.26 ; U12.4 38.1,54.5 ; U12.4 39.48,55.88 ; U12.4 36.72,55.88 ; U13.3 60.96,57.26 ; U13.3 62.34,55.88 ; U13.3 59.58,55.88 ; U13.3 60.96,54.5 ; U11.5 44.56,48.26 ; U11.5 41.8,48.26 ; U11.5 43.18,46.88 ; U11.5 43.18,49.64 ; 15.44,6.9 v3(14.61,6.9) 13.77,6.9
  vias: v1(1.23,49.88) v1(1.42,51.28) v1(1.52,58.63) v1(1.52,53.55) v1(1.52,45.93) v1(1.52,40.84) v1(1.52,38.31) v1(1.52,33.23) v1(1.52,28.15) v1(1.52,25.61) v1(1.52,20.53) v1(1.52,15.45) v1(1.52,10.37) v1(1.52,7.83) v1(1.52,5.29) v1(1.86,12.79) v1(2.36,14.12) v1(2.49,27.84) v1(2.49,26.43) v1(2.49,11.53) v1(2.49,10.11) v1(2.49,8.7) v1(2.49,7.28) v1(2.49,5.87) v1(2.49,4.46) v1(2.49,3.04) v1(2.56,52.12) v1(2.6,25.02) v1(2.79,58.67) v1(2.79,53.59) v1(2.79,45.97) v1(2.79,33.27) v1(2.85,29.21) v1(2.79,20.57) v1(3.13,38.46) v1(3.18,50.75) v1(3.22,13.01) v1(3.34,39.86) v1(3.36,15.12) v1(3.42,1.97) v1(3.67,24.08) v1(3.86,28) v1(3.86,26.59) v1(3.86,11.74) v1(3.86,10.33) v1(3.86,8.91) v1(3.86,7.5) v1(3.86,6.08) v1(3.86,4.67) v1(3.98,52.12) v1(4.04,49.63) v1(4.04,3.27) v1(4.06,53.59) v1(4.13,37.45) v1(4.09,29.89) v1(4.3,13.92) v1(4.4,55.59) v1(4.4,47.15) v1(4.4,36.07) v1(4.4,17.49) v1(4.4,16.08) v1(4.55,54.18) v1(4.48,40.69) v1(4.59,50.75) v1(4.69,25.45) v1(4.83,1.86) v1(5.04,48.63) v1(5.03,11.35) v1(5.03,9.93) v1(5.03,8.52) v1(5.03,7.1) v1(5.03,5.69) v1(5.03,4.27) v1(5.15,39.32) v1(5.08,24.08) v1(5.33,61.21) v1(5.33,43.43) v1(5.33,30.73) v1(5.27,28.06) v1(5.33,23.11) v1(5.39,52.12) v1(5.41,12.72) v1(5.55,53.18) v1(5.54,37.97) v1(5.5,29.75) v1(5.49,14.69) v1(5.76,55.59) v1(5.76,47.41) v1(5.76,36.57) v1(5.76,17.49) v1(5.76,16.08) v1(5.9,40.69) v1(6.01,50.75) v1(5.95,26.08) v1(6.06,2.56) v1(6.35,54.31) v1(6.4,11.01) v1(6.4,9.59) v1(6.4,8.18) v1(6.4,6.76) v1(6.4,5.35) v1(6.4,3.93) v1(6.48,24.31) v1(6.56,39.32) v1(6.68,27.94) v1(6.65,13.38) v1(6.8,51.95) v1(6.87,52.66) v1(7.04,49.78) v1(7.23,25.48) v1(7.31,40.69) v1(7.57,10.23) v1(7.57,8.81) v1(7.57,7.4) v1(7.57,5.98) v1(7.57,4.57) v1(7.57,3.15) v1(7.73,54.02) v1(7.8,50.95) v1(7.87,58.67) v1(7.87,45.97) v1(7.87,38.35) v1(7.87,33.27) v1(7.87,20.57) v1(7.87,15.49) v1(7.98,39.32) v1(7.97,28.53) v1(8.07,51.93) v1(8.06,13.22) v1(8.44,2.03) v1(8.65,25.45) v1(8.72,40.69) v1(8.81,53.11) v1(8.8,49.95) v1(8.94,12.11) v1(8.94,10.69) v1(8.94,9.28) v1(8.94,7.86) v1(8.94,6.45) v1(8.94,5.03) v1(8.94,3.62) v1(9.07,50.93) v1(9.29,24.04) v1(9.38,39.19) v1(9.38,28.53) v1(9.48,37.77) v1(9.48,36.36) v1(9.48,34.95) v1(9.48,33.53) v1(9.48,32.12) v1(9.48,30.7) v1(9.48,22.64) v1(9.48,21.23) v1(9.48,19.81) v1(9.48,18.4) v1(9.48,16.98) v1(9.48,15.57) v1(9.81,52.11) v1(9.8,48.95) v1(9.84,14.2) v1(9.84,1.86) v1(10.04,46.78) v1(10.04,25.21) v1(10.07,49.93) v1(10.11,40.38) v1(10.11,8.64) v1(10.11,7.23) v1(10.11,5.81) v1(10.11,4.4) v1(10.41,61.21) v1(10.41,58.67) v1(10.41,56.13) v1(10.41,53.59) v1(10.41,43.43) v1(10.57,29.29) v1(10.82,51.1) v1(10.8,47.95) v1(10.84,39.17) v1(10.84,37.76) v1(10.84,36.34) v1(10.84,34.93) v1(10.84,33.51) v1(10.84,32.1) v1(10.84,30.68) v1(10.84,24.04) v1(10.84,22.63) v1(10.84,21.21) v1(10.84,19.8) v1(10.84,18.38) v1(10.84,16.97) v1(10.84,15.55) v1(10.84,13.2) v1(10.82,9.87) v1(11.04,45.78) v1(11.07,48.93) v1(11.09,2.51) v1(11.48,8.12) v1(11.48,6.71) v1(11.48,5.29) v1(11.48,3.88) v1(11.6,14.36) v1(11.68,15.49) v1(11.82,50.11) v1(11.8,46.95) v1(11.84,12.2) v1(12.02,44.76) v1(12.02,43.35) v1(12.02,41.93) v1(12.02,40.52) v1(12.02,39.1) v1(12.02,37.69) v1(12.02,36.27) v1(12.02,34.86) v1(12.02,33.44) v1(12.02,32.03) v1(12.02,30.61) v1(12.02,29.2) v1(12.02,27.79) v1(12.02,26.37) v1(12.02,24.96) v1(12.02,23.54) v1(12.02,22.13) v1(12.02,20.71) v1(12.02,19.3) v1(12.02,17.88) v1(12.02,16.47) v1(12.08,47.92) v1(12.19,10.21) v1(12.65,15.2) v1(12.6,13.36) v1(12.82,49.11) v1(12.8,45.95) v1(12.84,11.2) v1(12.82,4.23) v1(12.95,61.21) v1(12.95,58.67) v1(12.95,56.13) v1(12.95,53.59) v1(12.95,51.05) v1(12.95,2.79) v1(13.07,46.92) v1(13.27,9.28) v1(13.38,44.66) v1(13.38,43.24) v1(13.38,41.83) v1(13.38,40.41) v1(13.38,39) v1(13.38,37.58) v1(13.38,36.17) v1(13.38,34.75) v1(13.38,33.34) v1(13.38,31.92) v1(13.38,30.51) v1(13.38,29.09) v1(13.38,27.68) v1(13.38,26.26) v1(13.38,24.85) v1(13.38,23.43) v1(13.38,22.02) v1(13.38,20.6) v1(13.38,19.19) v1(13.38,17.77) v1(13.41,16.36) v1(13.38,7.87) v1(13.38,6.46) v1(13.65,14.2) v1(13.6,12.36) v1(13.82,48.11) v1(13.84,10.2) v1(14.07,45.92) v1(14.22,15.49) v1(14.22,7.87) v1(14.56,44.59) v1(14.56,43.18) v1(14.56,41.77) v1(14.56,40.35) v1(14.56,38.94) v1(14.56,37.52) v1(14.56,36.11) v1(14.56,34.69) v1(14.56,33.28) v1(14.56,31.86) v1(14.56,30.45) v1(14.56,29.03) v1(14.56,27.62) v1(14.56,26.2) v1(14.56,24.79) v1(14.56,23.37) v1(14.56,21.96) v1(14.56,20.54) v1(14.56,19.13) v1(14.56,17.71) v1(14.56,16.3) v1(14.65,13.2) v1(14.82,47.1) v1(15.49,61.21) v1(15.49,58.67) v1(15.49,56.13) v1(15.49,53.59) v1(15.49,51.05) v1(15.49,48.51) v1(15.49,2.79) v1(15.82,46.1) v1(15.92,44.69) v1(15.92,43.28) v1(15.92,41.86) v1(15.92,40.45) v1(15.92,39.03) v1(15.92,37.62) v1(15.92,36.21) v1(15.92,34.79) v1(15.92,33.38) v1(15.92,31.96) v1(15.92,30.55) v1(15.92,29.13) v1(15.92,27.72) v1(15.92,26.3) v1(15.92,24.89) v1(15.92,23.47) v1(15.92,22.06) v1(15.92,20.64) v1(15.92,19.23) v1(15.92,17.81) v1(15.92,16.4) v1(16.05,14.99) v1(16.76,10.41) v1(17.05,13.99) v1(17.1,51.63) v1(17.1,50.22) v1(17.1,48.8) v1(17.1,47.39) v1(17.1,45.97) v1(17.1,44.56) v1(17.1,43.14) v1(17.1,41.73) v1(17.1,40.31) v1(17.1,38.9) v1(17.1,37.48) v1(17.1,36.07) v1(17.1,34.65) v1(17.1,33.24) v1(17.1,31.82) v1(17.1,30.41) v1(17.1,28.99) v1(17.1,27.58) v1(17.1,26.16) v1(17.1,24.75) v1(17.1,23.33) v1(17.1,21.92) v1(17.1,20.51) v1(17.1,19.09) v1(17.1,17.68) v1(17.1,16.26) v1(17.21,14.85) v1(17.67,52.92) v1(18.03,61.21) v1(18.03,58.67) v1(18.03,56.13) v1(18.03,53.59) v1(18.03,12.95) v1(18.03,7.87) v1(18.03,5.33) v1(18.03,2.79) v1(18.21,13.85) v1(18.46,51.54) v1(18.46,50.12) v1(18.46,48.71) v1(18.46,47.29) v1(18.46,45.88) v1(18.46,44.47) v1(18.46,43.05) v1(18.46,41.64) v1(18.46,40.22) v1(18.46,38.81) v1(18.46,37.39) v1(18.46,35.98) v1(18.46,34.56) v1(18.46,33.15) v1(18.46,31.73) v1(18.46,30.32) v1(18.46,28.9) v1(18.46,27.49) v1(18.46,26.07) v1(18.46,24.66) v1(18.46,23.24) v1(18.46,21.83) v1(18.46,20.41) v1(18.46,19) v1(18.46,17.58) v1(18.46,16.17) v1(19.01,53.39) v1(19.08,14.9) v1(19.21,12.85) v1(19.64,40.9) v1(19.64,39.49) v1(19.64,38.07) v1(19.64,36.66) v1(19.64,35.24) v1(19.64,33.83) v1(19.64,32.41) v1(19.64,31) v1(19.64,29.58) v1(19.64,28.17) v1(19.64,26.75) v1(19.64,25.34) v1(19.64,23.92) v1(19.64,22.51) v1(19.64,21.09) v1(19.64,19.68) v1(19.64,18.27) v1(19.64,16.85) v1(19.64,15.44) v1(19.79,52.02) v1(20.08,13.9) v1(20.26,42.17) v1(20.42,53.39) v1(20.57,61.21) v1(20.57,58.67) v1(20.57,56.13) v1(20.57,51.05) v1(20.57,48.51) v1(20.57,45.97) v1(20.57,43.43) v1(20.57,2.79) v1(21,40.68) v1(21,39.26) v1(21,37.85) v1(21,36.43) v1(21,35.02) v1(21,33.6) v1(21,32.19) v1(21,30.77) v1(21,29.36) v1(21,27.95) v1(21,26.53) v1(21,25.12) v1(21,23.7) v1(21,22.29) v1(21,20.87) v1(21,19.46) v1(21,18.04) v1(21,16.63) v1(21.2,52.02) v1(21.28,15.24) v1(21.61,42.59) v1(21.84,53.39) v1(21.84,40.89) v1(21.84,38.35) v1(22.18,37.57) v1(22.18,36.16) v1(22.18,34.74) v1(22.18,33.33) v1(22.18,31.92) v1(22.18,30.5) v1(22.18,29.09) v1(22.18,23.17) v1(22.18,21.76) v1(22.18,20.34) v1(22.18,18.93) v1(22.18,17.51) v1(22.33,40.21) v1(22.35,24.58) v1(22.3,16.1) v1(22.27,14.23) v1(22.27,12.81) v1(22.62,52.02) v1(22.95,42.14) v1(23.11,61.21) v1(23.11,58.67) v1(23.11,56.13) v1(23.11,51.05) v1(23.11,48.51) v1(23.11,45.97) v1(23.11,43.43) v1(23.09,38.66) v1(23.1,28.01) v1(23.11,2.79) v1(23.25,53.39) v1(23.44,39.32) v1(23.39,15.19) v1(23.54,36.13) v1(23.54,34.71) v1(23.54,33.3) v1(23.54,31.88) v1(23.54,30.47) v1(23.46,25.45) v1(23.54,22.76) v1(23.54,21.35) v1(23.54,19.93) v1(23.54,18.52) v1(23.54,17.1) v1(23.58,40.88) v1(24.03,52.02) v1(24.04,24.08) v1(24.04,13.38) v1(24.11,37.42) v1(24.26,29.26) v1(24.5,38.78) v1(24.51,27.89) v1(24.67,53.39) v1(24.8,15.19) v1(24.86,39.32) v1(24.88,25.45) v1(24.99,40.69) v1(25.45,52.02) v1(25.35,13.89) v1(25.53,37.42) v1(25.65,58.67) v1(25.65,51.05) v1(25.65,45.97) v1(25.65,33.27) v1(25.65,25.65) v1(25.65,20.57) v1(25.65,2.79) v1(25.92,38.78) v1(25.92,27.73) v1(25.99,26.32) v1(26.05,53.68) v1(26.17,16.07) v1(26.27,39.32) v1(26.4,40.69) v1(26.72,14.76) v1(26.72,13.34) v1(26.78,52.49) v1(26.79,24.56) v1(26.94,37.42) v1(26.95,28.62) v1(27.05,54.68) v1(27.26,56.08) v1(27.33,38.78) v1(27.26,23.15) v1(27.26,11.71) v1(27.35,27.27) v1(27.35,25.85) v1(27.53,10.06) v1(27.69,39.32) v1(27.78,53.49) v1(27.82,40.69) v1(27.89,12.97) v1(28.19,61.21) v1(28.19,51.05) v1(28.19,48.51) v1(28.19,43.43) v1(28.19,35.81) v1(28.19,30.73) v1(28.19,18.03) v1(28.19,15.49) v1(28.19,5.33) v1(28.19,2.79) v1(28.36,37.42) v1(28.41,25.56) v1(28.53,26.97) v1(28.53,11.06) v1(28.62,56.05) v1(28.62,54.63) v1(28.62,23.15) v1(28.75,38.78) v1(28.68,28.37) v1(29.1,39.32) v1(29.23,40.69) v1(29.21,24.44) v1(29.24,13.38) v1(29.46,2.79) v1(29.77,37.42) v1(29.8,11.67) v1(29.8,10.26) v1(29.89,27.09) v1(29.89,25.68) v1(30.01,45.04) v1(30.16,38.78) v1(30.41,46.4) v1(30.43,8.99) v1(30.43,7.58) v1(30.43,6.16) v1(30.43,4.75) v1(30.43,3.34) v1(30.52,39.32) v1(30.65,40.69) v1(30.58,12.92) v1(30.73,58.67) v1(30.73,53.59) v1(30.73,51.05) v1(30.73,25.65) v1(30.73,20.57) v1(30.73,15.49) v1(30.77,33.7) v1(30.77,32.34) v1(31.05,27.89) v1(31.19,37.42) v1(31.16,11.63) v1(31.19,2.14) v1(31.42,45.04) v1(31.37,10.23) v1(31.57,38.78) v1(31.83,46.4) v1(31.93,39.32) v1(31.97,41.18) v1(32.18,33.78) v1(32.18,32.34) v1(32.15,3.27) v1(32.34,43.96) v1(32.34,42.55) v1(32.34,36.6) v1(32.34,35.18) v1(32.34,27.31) v1(32.34,25.9) v1(32.34,24.48) v1(32.34,23.07) v1(32.34,21.65) v1(32.34,20.24) v1(32.34,18.82) v1(32.34,17.41) v1(32.34,15.99) v1(32.34,14.58) v1(32.34,13.16) v1(32.34,11.75) v1(32.34,10.33) v1(32.34,8.92) v1(32.34,7.5) v1(32.34,6.09) v1(32.34,4.67) v1(32.62,29.26) v1(32.58,1.86) v1(32.93,45.5) v1(32.98,40.27) v1(32.96,38.49) v1(33.27,61.21) v1(33.27,58.67) v1(33.27,56.13) v1(33.27,53.59) v1(33.27,51.05) v1(33.27,48.51) v1(33.27,30.73) v1(33.4,33.07) v1(33.64,28.28) v1(33.62,2.81) v1(33.7,44.32) v1(33.7,42.91) v1(33.7,41.49) v1(33.7,37.28) v1(33.7,35.87) v1(33.7,34.45) v1(33.7,26.87) v1(33.7,25.45) v1(33.7,24.04) v1(33.7,22.62) v1(33.7,21.21) v1(33.7,19.79) v1(33.7,18.38) v1(33.7,16.96) v1(33.7,15.55) v1(33.7,14.13) v1(33.7,12.72) v1(33.7,11.3) v1(33.7,9.89) v1(33.7,8.47) v1(33.7,7.06) v1(33.7,5.64) v1(33.7,4.23) v1(34.24,36.63) v1(34.24,35.22) v1(34.24,33.8) v1(34.24,26.29) v1(34.24,24.87) v1(34.24,23.46) v1(34.24,22.04) v1(34.24,20.63) v1(34.24,19.22) v1(34.24,17.8) v1(34.24,16.39) v1(34.24,11.78) v1(34.24,10.36) v1(34.24,8.95) v1(34.24,7.53) v1(34.24,6.12) v1(34.24,4.7) v1(34.24,3.29) v1(34.36,27.7) v1(34.44,13.18) v1(34.52,38.02) v1(34.88,43.94) v1(34.88,42.52) v1(34.9,41.11) v1(35.01,32.61) v1(35.03,2.11) v1(35.16,15.31) v1(35.4,45.25) v1(35.43,28.62) v1(35.61,36.29) v1(35.61,34.87) v1(35.61,25.72) v1(35.61,24.3) v1(35.61,22.89) v1(35.61,21.47) v1(35.61,20.06) v1(35.61,18.64) v1(35.61,17.23) v1(35.59,14.02) v1(35.61,11.28) v1(35.56,9.53) v1(35.56,8.26) v1(35.71,38.78) v1(35.81,61.21) v1(35.81,58.67) v1(35.81,56.13) v1(35.81,53.59) v1(35.81,51.05) v1(35.81,48.51) v1(35.83,40.04) v1(35.81,30.73) v1(35.91,12.65) v1(35.9,6.75) v1(35.9,5.34) v1(35.9,3.92) v1(36.24,43.07) v1(36.24,41.65) v1(36.15,27.02) v1(36.4,46.25) v1(36.4,33.7) v1(36.4,32.34) v1(36.42,1.86) v1(36.53,44.45) v1(36.45,37.42) v1(36.58,15.19) v1(36.81,28.29) v1(36.85,16.56) v1(36.95,10.84) v1(37,14.02) v1(37.01,8.4) v1(37.13,38.78) v1(37.15,26.02) v1(37.27,40.69) v1(37.33,12.65) v1(37.45,2.83) v1(37.51,4.25) v1(37.81,46.4) v1(37.81,45.04) v1(37.81,33.7) v1(37.81,32.34) v1(37.87,37.42) v1(38.01,27.54) v1(37.98,15.03) v1(38.35,58.67) v1(38.35,53.59) v1(38.35,51.05) v1(38.35,20.57) v1(38.35,2.79) v1(38.54,38.78) v1(38.56,26.17) v1(38.69,40.69) v1(38.7,12.98) v1(39.01,28.54) v1(39.28,37.42) v1(39.32,15.62) v1(39.42,14.2) v1(39.96,55.59) v1(39.96,38.78) v1(39.96,25.98) v1(39.96,24.56) v1(39.96,23.15) v1(39.96,13.14) v1(40.1,40.69) v1(40.23,14.52) v1(40.42,28.49) v1(40.6,54.33) v1(40.7,37.42) v1(40.89,61.21) v1(40.89,51.05) v1(40.89,48.51) v1(40.89,43.43) v1(40.89,35.81) v1(40.89,30.73) v1(40.89,18.03) v1(40.89,10.41) v1(40.89,7.87) v1(40.89,5.33) v1(40.89,2.79) v1(41.32,55.59) v1(41.28,28.27) v1(41.32,27.39) v1(41.32,25.98) v1(41.32,24.56) v1(41.32,23.15) v1(41.32,12.61) v1(41.37,38.78) v1(41.43,15.29) v1(41.52,40.69) v1(41.6,53.33) v1(41.83,13.92) v1(42.11,37.42) v1(42.05,24.29) v1(42.16,51.05) v1(42.16,12.95) v1(42.29,54.56) v1(42.6,52.33) v1(42.59,26.75) v1(42.79,38.78) v1(42.84,15.29) v1(42.93,40.69) v1(42.85,12.7) v1(43.13,25.45) v1(43.25,13.92) v1(43.29,53.56) v1(43.43,58.67) v1(43.43,45.97) v1(43.43,33.27) v1(43.42,27.89) v1(43.43,20.57) v1(43.43,2.79) v1(43.53,37.42) v1(43.6,51.33) v1(43.86,13.7) v1(44.13,15.88) v1(44.2,38.78) v1(44.29,52.56) v1(44.35,40.69) v1(44.54,25.45) v1(44.6,50.33) v1(44.58,14.41) v1(44.7,33.27) v1(44.8,36.8) v1(44.84,27.89) v1(44.87,24.02) v1(45.04,41.92) v1(45.04,35.4) v1(45.04,33.99) v1(45.04,32.57) v1(45.04,31.16) v1(45.04,29.74) v1(45.04,22.62) v1(45.04,21.2) v1(45.04,19.79) v1(45.04,18.37) v1(45.04,16.96) v1(45.09,26.67) v1(45.29,51.56) v1(45.43,38.08) v1(45.53,39.49) v1(45.6,49.32) v1(45.58,15.41) v1(45.9,43.05) v1(45.86,24.95) v1(45.97,61.21) v1(45.97,58.67) v1(45.97,56.13) v1(45.97,53.59) v1(45.97,45.97) v1(45.97,2.79) v1(46.07,28.6) v1(46.29,50.56) v1(46.4,40.61) v1(46.4,37.05) v1(46.4,35.63) v1(46.4,34.22) v1(46.4,32.8) v1(46.4,31.39) v1(46.4,29.97) v1(46.4,23.63) v1(46.4,22.22) v1(46.4,20.81) v1(46.4,19.39) v1(46.4,17.98) v1(46.4,16.56) v1(46.6,48.32) v1(47.05,41.86) v1(47.24,45.97) v1(47.29,49.56) v1(47.3,43.23) v1(47.6,47.33) v1(47.58,40.56) v1(47.58,39.14) v1(47.58,37.73) v1(47.58,36.31) v1(47.58,34.9) v1(47.58,33.48) v1(47.58,32.07) v1(47.58,30.65) v1(47.58,29.24) v1(47.58,27.82) v1(47.58,26.41) v1(47.58,24.99) v1(47.58,23.58) v1(47.58,22.16) v1(47.58,20.75) v1(47.58,19.33) v1(47.58,17.92) v1(47.79,14.45) v1(48.29,48.56) v1(48.3,14.02) v1(48.51,61.21) v1(48.51,58.67) v1(48.51,56.13) v1(48.51,53.59) v1(48.51,51.05) v1(48.51,43.43) v1(48.51,2.79) v1(48.6,46.32) v1(48.55,42.58) v1(48.79,15.45) v1(48.94,41.21) v1(48.94,39.8) v1(48.94,38.38) v1(48.94,36.97) v1(48.94,35.55) v1(48.94,34.14) v1(48.94,32.73) v1(48.94,31.31) v1(48.94,29.9) v1(48.94,28.48) v1(48.94,27.07) v1(48.94,25.65) v1(48.94,24.24) v1(48.94,22.82) v1(48.94,21.41) v1(48.94,19.99) v1(48.94,18.58) v1(48.97,17.55) v1(49.29,47.56) v1(49.45,14.85) v1(49.44,9.48) v1(49.6,45.32) v1(49.71,10.84) v1(49.79,16.45) v1(49.97,18.55) v1(50.12,44.01) v1(50.12,42.59) v1(50.12,41.18) v1(50.12,39.76) v1(50.12,38.35) v1(50.12,36.93) v1(50.12,35.52) v1(50.12,34.1) v1(50.12,32.69) v1(50.12,31.28) v1(50.12,29.86) v1(50.12,28.45) v1(50.12,27.03) v1(50.12,25.62) v1(50.12,24.2) v1(50.12,22.79) v1(50.12,21.37) v1(50.12,19.96) v1(50.08,11.5) v1(50.29,46.56) v1(50.44,15.85) v1(50.43,13.91) v1(50.79,17.45) v1(50.86,9.48) v1(51.05,61.21) v1(51.05,58.67) v1(51.05,56.13) v1(51.05,53.59) v1(51.05,51.05) v1(51.05,48.51) v1(51.13,10.84) v1(51.05,5.33) v1(51.05,2.79) v1(51.29,45.55) v1(51.45,16.85) v1(51.42,14.91) v1(51.48,44.15) v1(51.48,42.74) v1(51.48,41.32) v1(51.48,39.91) v1(51.48,38.49) v1(51.48,37.08) v1(51.48,35.66) v1(51.48,34.25) v1(51.48,32.83) v1(51.48,31.42) v1(51.48,30.01) v1(51.48,28.59) v1(51.48,27.18) v1(51.48,25.76) v1(51.48,24.35) v1(51.48,22.93) v1(51.48,21.52) v1(51.48,20.1) v1(51.48,18.69) v1(51.5,11.5) v1(52.27,9.48) v1(52.32,2.79) v1(52.45,17.85) v1(52.43,15.91) v1(52.54,10.84) v1(52.58,13.52) v1(52.66,46.13) v1(52.66,44.71) v1(52.66,43.3) v1(52.66,41.88) v1(52.66,40.47) v1(52.66,39.06) v1(52.66,37.64) v1(52.66,36.23) v1(52.66,34.81) v1(52.66,33.4) v1(52.66,31.98) v1(52.66,30.57) v1(52.66,29.15) v1(52.66,27.74) v1(52.66,26.32) v1(52.66,24.91) v1(52.66,23.49) v1(52.66,22.08) v1(52.66,20.66) v1(52.66,19.25) v1(52.91,11.5) v1(53.29,8.5) v1(53.29,7.09) v1(53.29,5.67) v1(53.29,4.26) v1(53.35,2.84) v1(53.38,47.35) v1(53.43,16.91) v1(53.59,61.21) v1(53.59,58.67) v1(53.59,56.13) v1(53.59,53.59) v1(53.59,51.05) v1(53.58,14.52) v1(53.92,10.54) v1(54.02,45.07) v1(54.02,43.66) v1(54.02,42.25) v1(54.02,40.83) v1(54.02,39.42) v1(54.02,38) v1(54.02,36.59) v1(54.02,35.17) v1(54.02,33.76) v1(54.02,32.34) v1(54.02,30.93) v1(54.02,29.51) v1(54.02,28.1) v1(54.02,26.68) v1(54.02,25.27) v1(54.02,23.85) v1(54.02,22.44) v1(54.02,21.02) v1(54.02,19.61) v1(54.02,18.19) v1(54,12.4) v1(54.37,48.35) v1(54.39,46.44) v1(54.36,1.86) v1(54.58,15.52) v1(54.66,9.32) v1(54.66,7.91) v1(54.85,17.71) v1(55,13.4) v1(55.2,45.96) v1(55.2,44.54) v1(55.2,43.13) v1(55.2,41.71) v1(55.2,40.3) v1(55.2,38.88) v1(55.2,37.47) v1(55.2,36.06) v1(55.2,34.64) v1(55.2,33.23) v1(55.2,31.81) v1(55.2,30.4) v1(55.2,28.98) v1(55.2,27.57) v1(55.2,26.15) v1(55.2,24.74) v1(55.2,23.32) v1(55.2,21.91) v1(55.2,20.49) v1(55.2,19.08) v1(55.2,6.6) v1(55.2,5.19) v1(55.2,3.77) v1(55.37,49.35) v1(55.39,47.44) v1(55.58,16.52) v1(55.76,2.09) v1(56,14.4) v1(56.13,61.21) v1(56.13,58.67) v1(56.13,56.13) v1(56.13,53.59) v1(56.13,12.95) v1(56.13,10.41) v1(56.19,7.62) v1(56.38,50.35) v1(56.39,48.44) v1(56.56,45.84) v1(56.56,44.42) v1(56.56,43.01) v1(56.56,41.6) v1(56.56,40.18) v1(56.56,38.77) v1(56.56,37.35) v1(56.56,35.94) v1(56.56,34.52) v1(56.56,33.11) v1(56.56,31.69) v1(56.56,30.28) v1(56.56,28.86) v1(56.56,27.45) v1(56.56,26.03) v1(56.56,24.62) v1(56.56,23.2) v1(56.56,21.79) v1(56.56,20.37) v1(56.56,18.96) v1(56.56,17.54) v1(57.01,15.41) v1(57.1,5.97) v1(57.1,4.56) v1(57.1,3.14) v1(57.38,51.35) v1(57.39,49.44) v1(57.4,48.51) v1(57.4,18.03) v1(57.51,46.88) v1(57.6,7.5) v1(57.74,40.13) v1(57.74,38.71) v1(57.74,37.3) v1(57.74,35.89) v1(57.74,34.47) v1(57.74,33.06) v1(57.74,31.64) v1(57.74,30.23) v1(57.74,24.31) v1(57.74,22.9) v1(57.74,21.48) v1(57.74,20.07) v1(57.74,18.65) v1(57.78,26.67) v1(57.85,28.81) v1(58.01,16.4) v1(57.97,2.03) v1(58.38,52.35) v1(58.39,50.44) v1(58.51,47.88) v1(58.67,61.21) v1(58.67,58.67) v1(58.67,56.13) v1(58.67,53.59) v1(58.67,45.97) v1(58.67,43.43) v1(58.66,41.2) v1(58.69,25.36) v1(58.67,15.49) v1(58.67,12.95) v1(58.67,10.41) v1(58.93,27.89) v1(59.01,17.4) v1(59.01,6.49) v1(59.01,5.08) v1(59.01,3.66) v1(59.1,39.01) v1(59.1,37.6) v1(59.1,36.18) v1(59.1,34.77) v1(59.1,33.35) v1(59.1,31.94) v1(59.1,30.52) v1(59.05,26.67) v1(59.1,23.06) v1(59.1,21.65) v1(59.1,20.23) v1(59.1,18.82) v1(59.38,53.35) v1(59.39,51.44) v1(59.38,1.91) v1(59.55,7.8) v1(59.94,51.05) v1(60.07,41.32) v1(60.15,39.96) v1(60.1,25.45) v1(60.35,27.89) v1(60.38,54.35) v1(60.39,52.44) v1(60.52,49.88) v1(60.91,26.6) v1(60.87,8.3) v1(60.91,5.64) v1(60.91,4.22) v1(61.21,58.67) v1(61.21,45.97) v1(61.21,38.35) v1(61.21,33.27) v1(61.21,20.57) v1(61.21,15.49) v1(61.21,12.95) v1(61.21,10.41) v1(61.21,2.79) v1(61.29,51.48) v1(61.52,53.29) v1(61.48,41.32) v1(61.56,39.96) v1(61.89,49.55) v1(62.04,7.5) v1(62.04,1.86) v1(62.19,28.31) v1(62.28,26.89) v1(62.28,25.48) v1(62.54,50.82) v1(62.71,3.35) v1(62.82,55.59) v1(62.82,48.48) v1(62.82,37.26) v1(62.82,35.85) v1(62.82,17.49) v1(62.82,16.08) v1(62.82,14.66) v1(62.82,13.25) v1(62.82,11.83) v1(62.82,10.42) v1(62.82,9) v1(62.82,7.59) v1(62.82,6.17) v1(62.82,4.76) v1(62.93,53.29) v1(62.9,41.32) v1(62.98,39.96) v1(63.09,38.65) v1(63.43,2.14) v1(63.54,49.82) v1(63.75,61.21) v1(63.75,51.05) v1(63.75,43.43) v1(63.75,30.73) v1(63.75,28.19) v1(63.75,25.65) v1(63.75,23.11) v1(64.03,54.18) v1(64.18,55.59) v1(64.18,48.56) v1(64.18,37.26) v1(64.18,35.85) v1(64.18,17.49) v1(64.18,16.08) v1(64.18,14.66) v1(64.18,13.25) v1(64.18,11.83) v1(64.18,10.42) v1(64.18,9) v1(64.18,7.59) v1(64.18,6.17) v1(64.18,4.76) v1(64.18,3.34) v1(64.31,41.32) v1(64.28,39.42) v1(65.35,38.05) v1(65.73,41.28) v1(66.29,58.67) v1(66.29,53.59) v1(66.29,51.05) v1(66.29,45.97) v1(66.29,33.27) v1(66.29,28.19) v1(66.29,25.65) v1(66.29,20.57) v1(66.29,15.49) v1(66.29,12.95) v1(66.29,10.41) v1(66.29,7.87) v1(66.29,5.33) v1(66.29,2.79) v1(66.51,38.87) v1(66.72,40.27) v2(20.32,11.34) v2(22.86,11.34) v2(39.37,11.34) v2(43.18,11.34) v2(45.72,11.34) v3(19.05,11.34) v3(21.59,11.34) v3(24.13,11.34) v3(41.91,11.34) v3(44.45,11.34) v3(46.99,11.34)
N17882: length 61.7
  TOP w0.157: U1.1 5.08,37.47 3.81,38.73 3.81,39.37 4.45,40.01 9.53,40.01 10.16,39.37 10.16,29.84 9.53,29.21 6.99,29.21 6.35,28.57 5.71,28.57 5.08,29.21 3.81,29.21 3.17,28.57 3.17,25.4 3.81,24.77 5.08,24.77 5.71,25.4 6.35,25.4 6.99,24.77 9.53,24.77 10.16,24.13 10.16,14.84 15.24,9.76 R4.2 15.24,8.2 15.78,7.66 15.78,7.66 J1.11
N17894: length 61.9
  BOTTOM w0.157: J1.9 R3.2 19.05,9.76 12.7,16.11 12.7,45.09 6.35,51.44 2.54,51.44 1.91,50.8 1.91,50.16 2.54,49.53 3.17,49.53 5.08,47.62 U3.1
N17906: length 61.7
  BOTTOM w0.157: J1.7 R2.2 21.59,9.76 20.32,11.03 20.32,12.7 17.78,15.24 17.78,52.07 18.41,52.7 26.04,52.7 27.94,54.61 U5.1
N17918: length 61.9
  BOTTOM w0.157: U7.1 32.38,33.02 33.02,33.66 33.02,37.47 32.38,38.1 23.5,38.1 22.86,37.47 22.86,29.21 23.5,28.57 26.04,28.57 26.67,27.94 26.67,25.4 26.04,24.77 23.5,24.77 22.86,24.13 22.86,16.51 23.5,15.88 25.4,15.88 26.04,15.24 26.04,13.34 25.4,12.7 23.5,12.7 22.86,12.06 22.86,11.03 24.13,9.76 R1.2 J1.5
N17930: length 61.7
  BOTTOM w0.157: U2.1 5.08,15.24 4.45,14.61 3.81,14.61 2.54,13.34 2.54,12.7 3.17,12.06 3.17,3.17 3.81,2.54 5.08,2.54 5.71,3.17 5.71,12.06 6.35,12.7 7.62,12.7 8.26,12.07 8.26,3.17 8.89,2.54 10.16,2.54 10.79,3.17 10.79,8.89 11.43,9.53 12.06,9.53 12.7,8.89 12.7,5.31 13.48,4.53 R5.2 16.37,4.53 J1.12
N17948: length 61.6
  TOP w0.157: U4.1 5.08,54.61 6.35,53.34 7.62,53.34 15.24,45.72 15.24,14.84 20.32,9.76 R6.2 20.32,5.66 J1.10
N17973: length 61.9
  TOP w0.157: U6.1 31.75,45.72 33.02,44.45 33.02,41.27 31.75,40.01 23.5,40.01 22.86,40.64 22.86,41.27 22.23,41.91 20.95,41.91 20.32,41.27 20.32,15.24 21.59,13.97 21.59,11.04 22.86,9.77 R7.2 22.86,5.66 J1.8
N17998: length 61.7
  TOP w0.157: J1.6 25.39,5.65 25.39,7.05 25.4,7.06 R8.2 25.4,9.77 26.09,10.46 26.97,10.46 27.94,11.43 27.94,12.06 28.57,12.7 29.84,12.7 30.48,12.06 30.48,10.16 31.11,9.53 31.11,3.17 31.75,2.54 32.38,2.54 33.02,3.17 33.02,27.94 32.38,28.57 29.84,28.57 29.21,27.94 29.21,25.4 27.94,24.13 U8.1
N19655: length 61.5
  TOP w0.157: J2.11 R12.2 39.37,9.76 40.64,11.03 40.64,13.97 41.27,14.61 43.81,14.61 45.72,16.51 45.72,24.13 45.09,24.77 42.55,24.77 41.91,25.4 41.91,27.94 42.55,28.57 45.09,28.57 45.72,29.21 45.72,36.83 44.45,38.1 35.56,38.1 34.92,37.47 34.92,33.66 35.56,33.02 U9.1
N19661: length 61.7
  BOTTOM w0.157: U11.1 36.83,45.72 35.56,44.45 35.56,41.27 35.56,41.27 36.83,40.01 45.09,40.01 45.72,40.64 45.72,41.91 46.35,42.55 47.62,42.55 48.26,41.91 48.26,17.14 43.18,12.06 43.18,11.03 41.91,9.76 R11.2 J2.9
N19667: length 61.6
  BOTTOM w0.157: U13.1 63.5,54.61 62.87,53.98 60.96,53.98 53.34,46.35 53.34,17.78 48.89,13.34 46.99,13.34 45.72,12.06 45.72,11.03 44.45,9.76 R10.2 J2.7
N19673: length 61.6
  BOTTOM w0.157: U15.1 63.5,38.1 64.14,38.73 65.41,38.73 66.04,39.37 66.04,40.01 65.41,40.64 59.05,40.64 58.42,40.01 58.42,29.21 59.05,28.57 60.96,28.57 61.59,27.94 61.59,25.4 60.96,24.77 59.05,24.77 58.42,24.13 58.42,17.78 52.82,12.18 49.41,12.18 46.99,9.76 R9.2 J2.5
N19679: length 61.8
  BOTTOM w0.157: U10.1 40.64,27.3 40.01,27.94 39.37,27.94 38.1,26.67 37.47,26.67 36.2,27.94 35.56,27.94 34.92,27.3 34.92,16.51 35.56,15.88 38.1,15.88 38.73,15.24 38.73,13.97 38.1,13.34 35.56,13.34 34.92,12.7 34.92,3.17 35.56,2.54 36.2,2.54 36.83,3.17 36.83,7.62 36.2,8.26 36.2,9.53 36.83,10.16 37.7,10.16 38.1,9.76 R13.2 38.1,5.66 J2.12
N19687: length 61.9
  TOP w0.157: J2.10 43.18,5.66 R14.2 43.18,9.76 44.45,11.03 44.45,12.07 50.8,18.42 50.8,45.09 40.64,55.24 U12.1
N19697: length 61.9
  TOP w0.157: U14.1 63.5,48.9 61.59,50.8 60.47,50.8 55.88,46.21 55.88,17.78 50.8,12.7 47.62,12.7 46.82,11.9 46.82,10.87 45.72,9.77 R15.2 45.72,5.66 J2.8
N19707: length 61.7
  TOP w0.157: U16.1 63.5,3.17 62.87,2.54 62.23,2.54 61.59,3.17 61.59,6.99 60.96,7.62 60.33,7.62 59.69,6.99 59.69,3.17 59.05,2.54 58.42,2.54 57.78,3.17 57.78,6.35 57.15,6.99 56.52,6.99 55.88,6.35 55.88,3.17 55.25,2.54 54.61,2.54 53.98,3.17 53.98,9.53 53.34,10.16 48.66,10.16 48.26,9.76 R16.2 48.26,8.2 48.25,8.19 48.25,6.82 48.26,6.81 48.26,5.66 J2.6

## Copper pours and planes (outline as drawn; the poured copper is in the pictures)
GND on TOP: 0.51,62.99 68.07,62.99 68.07,0.51 0.51,0.51 ; 2 cut-outs
GND on BOTTOM, GND1, GND2: 0.51,62.99 68.07,62.99 68.07,0.51 0.51,0.51

## Text on the board
Ref Des/Silkscreen Bottom: 1 | 8 7 6
Ref Des/Silkscreen Top: JA6 | JA5 | JA1 | JA2 | 5  2 3 4 | JA7 | JA3 | JA8 | JA4 | 5 2 3 4 | JB2 | JB6 | JB5 | JB1 | PMOD2SMA | JB7 | JB3 | JB8 | JB4 | QuIQCL
NCLEGEND-1-4: FIGURE | FINISHED_SIZE | 0.013 | 0.0433 | 0.0591 | 0.063 | DRILL CHART: TOP to BOTTOM | ALL UNITS ARE IN INCHES | DRILLED_SIZE | - | PLATED | QTY | 1266 | 22 | 2 | 16 | 64 | 1370 | TOTAL HOLES:
NCLEGEND-3-4: FIGURE | FINISHED_SIZE | 0.028 | DRILL CHART: GND2 to BOTTOM | ALL UNITS ARE IN INCHES | DRILLED_SIZE | - | PLATED | QTY | 8 | TOTAL HOLES:
NCLEGEND-1-2: FIGURE | FINISHED_SIZE | 0.028 | DRILL CHART: TOP to GND1 | ALL UNITS ARE IN INCHES | DRILLED_SIZE | - | PLATED | QTY | 8 | TOTAL HOLES:
